# Altium PCB djb_v2_jig_b.PcbDoc
Units mm, origin at the board's own origin, x right, y up, seen from the top; angles counter-clockwise.
Board outline 29 x 28 mm, 2 copper layers (Top Layer, Bottom Layer); 14 components, 6 nets, 14 pads, 0 vias.
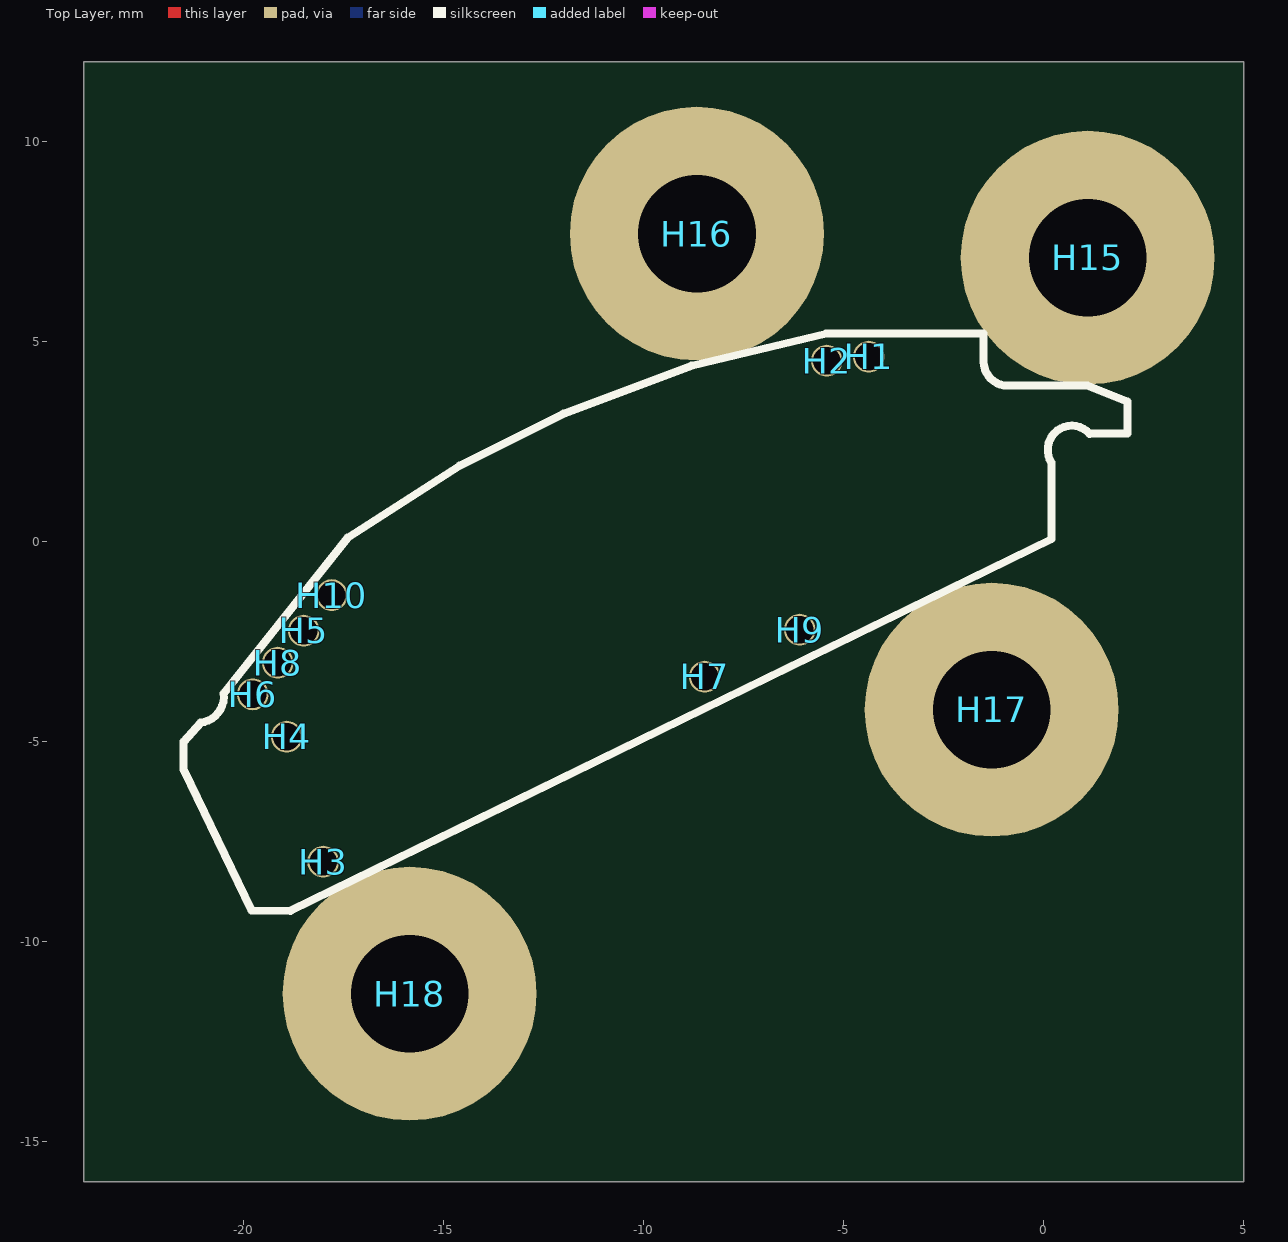
[diagram p0: Top Layer view]
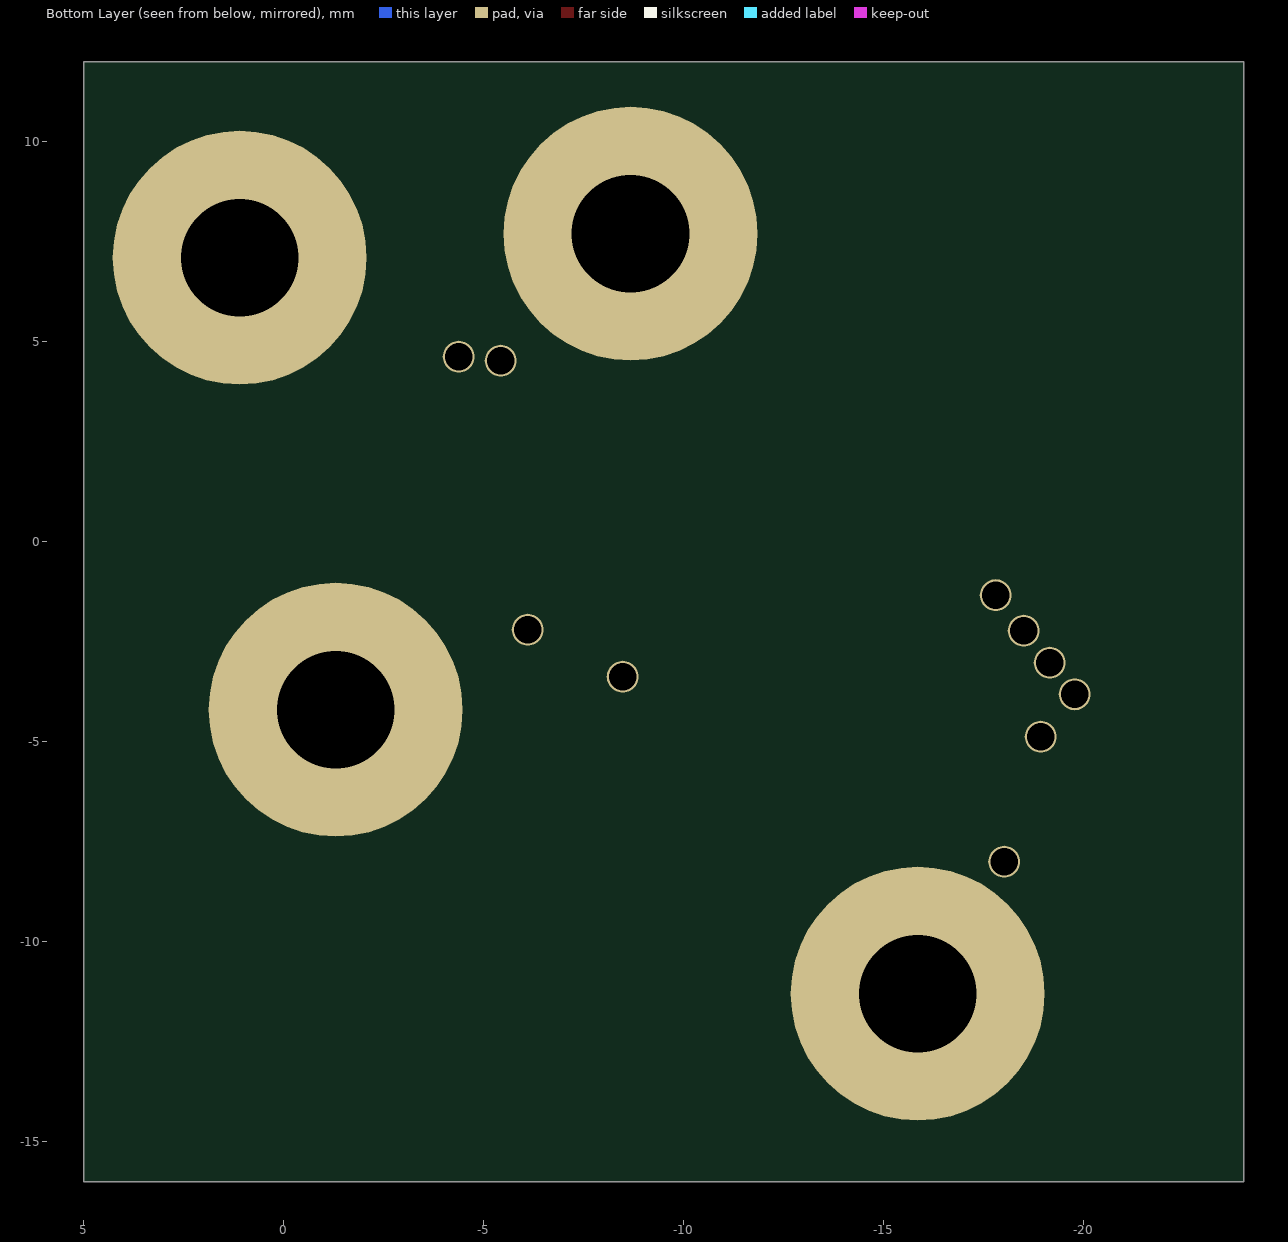
[diagram p1: Bottom Layer view, seen from below]

## Layer stack, top to bottom
Top Solder: solder mask 0.0102, Solder Resist, Dk 3.5
Top Layer: signal copper 0.0356
Dielectric 1: dielectric 0.32, FR-4, Dk 4.8
Bottom Layer: signal copper 0.0356
Bottom Solder: solder mask 0.0102, Solder Resist, Dk 3.5

## Board outline
-24,-16 5,-16 5,12 -24,12

## Design rules (kind name [scope] priority, off if disabled: settings)
Clearance [All] p1: gap=0.178 ignorepadtopadclearanceinfootprint=FALSE
ComponentClearance [All] p1: gap=0.025 collisioncheckmode=3 verticalgap=0.025 showdistances=TRUE
HoleSize [All] p1: absolutevalues=TRUE maxlimit=5.08 minlimit=0.254 maxpercent=80.000 minpercent=20.000
MinimumSolderMaskSliver [All] p1: minsoldermaskwidth=0.127
PolygonConnect [All] p1: connectstyle=Relief reliefconductorwidth=0.254 reliefentries=4 polygonreliefangle="90 Angle" airgapwidth=0.254
RoutingVias [All] p1: holewidth=0.51 width=0.8 viastyle="Through Hole" minholewidth=0.51 minwidth=0.8 maxholewidth=0.51 maxwidth=0.8
SilkToSilkClearance [All] p1: silktosilkclearance=0
SilkToSolderMaskClearance [IsPad] p1: minsilkscreentomaskgap=0 clearancetoexposedcopper=TRUE
SolderMaskExpansion [All] p1: expansion=0.102
Width [All] p1: maxlimit=1.27 minlimit=0.254 preferedwidth=0.254 minimp=50.000000 maximp=50.000000 favimp=50.000000
25 further rules are at their usual default settings.

## Components (designator, comment, footprint, x,y, rotation, side; value= is the part's Value field where it differs from the comment)
H1 "SMITHS_S-00-U-1.3-G_MID" SMITHS_S-00-U-1.3-G_MID -4.375,4.625 r0 top
H2 "SMITHS_S-00-U-1.3-G_MID" SMITHS_S-00-U-1.3-G_MID -5.425,4.525 r0 top
H3 "SMITHS_S-00-U-1.3-G_MID" SMITHS_S-00-U-1.3-G_MID -18.013,-8 r0 top
H4 "SMITHS_S-00-U-1.3-G_MID" SMITHS_S-00-U-1.3-G_MID -18.925,-4.875 r0 top
H5 "SMITHS_S-00-U-1.3-G_MID" SMITHS_S-00-U-1.3-G_MID -18.5,-2.225 r0 top
H6 "SMITHS_S-00-U-1.3-G_MID" SMITHS_S-00-U-1.3-G_MID -19.775,-3.816 r0 top
H7 "SMITHS_S-00-U-1.3-G_MID" SMITHS_S-00-U-1.3-G_MID -8.474,-3.375 r0 top
H8 "SMITHS_S-00-U-1.3-G_MID" SMITHS_S-00-U-1.3-G_MID -19.15,-3.025 r0 top
H9 "SMITHS_S-00-U-1.3-G_MID" SMITHS_S-00-U-1.3-G_MID -6.1,-2.2 r0 top
H10 "SMITHS_S-00-U-1.3-G_MID" SMITHS_S-00-U-1.3-G_MID -17.8,-1.336 r90 top
H15 "4-40" SCREW_4-40_BLANK 1.1,7.1 r0 top
H16 "4-40" SCREW_4-40_BLANK -8.671,7.7 r0 top
H17 "4-40" SCREW_4-40_BLANK -1.3,-4.2 r0 top
H18 "4-40" SCREW_4-40_BLANK -15.85,-11.3 r0 top

## Footprints (in the part's own frame and the unit in brackets; to place one, negate y for a bottom-side part, rotate by r counter-clockwise, add the part's x,y. Pads: shape width x height; smd on the part's side, far side on the other; paste and mask are expansions set on the pad)
SCREW_4-40_BLANK [mil] "Hole for 4-40 screw"
  round 250 hole 116 paste-39370.1 mask-39370.1: 0(0,0)
  body extent -4,96 4,104, height 0
SMITHS_S-00-U-1.3-G_MID [mm] "Smiths Interconnect / IDI S-00-U-1.3-G Pogo Pin, Mid Mount"
  round 0.8 hole 0.69: 1(0,0)
  body extent -0.02,0.36 0.02,0.39, height 0.01

## Part data
H1 H2 H3 H4 H5 H6 H7 H8 H9 H10: "Smiths Interconnect / IDI S-00-U-1.3-G Pogo Pin 0.99mm Centers 16.7mm Long 2.8mm Travel, Mid Mount"
H15 H16 H17 H18: library part SCREW_4-40_EMPTY

## Nets (pads, with @x,y where several pads share a name; then routed paths per layer and width w, separated by ;. In a path a pad name is that pad's centre, name@x,y a point inside that pad or via, vN(x,y) a via of type N, cw(c..) or ccw(c..) an arc to the next point about the centre after c; other vN are vias at no path point)
+3V7: 
GND: 
TCK: 
TDI: 
TDO: 
TMS: 
pads on no net: H1.1 H2.1 H3.1 H4.1 H5.1 H6.1 H7.1 H8.1 H9.1 H10.1 H15.0 H16.0 H17.0 H18.0

## Polygon pours and split planes (outlines as drawn)
no net on Bottom Layer "Bottom Layer-No Net" (solid, pour order 0): -23,13

## Silkscreen, mask and mechanical layers (free items; w line width, h text height)
Top Overlay:
  lines w0.2: 0.197,1.973 cw(c0.7,2.3) 1.148,2.699 ; 0.2,1.975 0.2,0.07 -18.836,-9.227 -19.8,-9.225 -21.5,-5.7 -21.5,-5 -21.075,-4.525 ccw(c-21.153,-3.875) -20.503,-3.797 -17.4,0.1 -14.6,1.9 -12,3.2 -8.8,4.4 -5.44,5.2 -1.5,5.2 -1.5,4.5 ; 1.148,2.7 2.1,2.7 2.1,3.5 1.1,3.9 -0.9,3.9 cw(c-0.9,4.5) -1.5,4.5 ; -1.5,4.5 -1.5,4.5
Top Solder:
  region: -5.1,4.9 -4.7,4.9 -4.7,4.3 -5.1,4.3
  region: -19.8,-3.5 -18.8,-2.2 -18.4,-2.5 -19.4,-3.8
Bottom Solder:
  region: -5.1,4.9 -4.7,4.9 -4.7,4.3 -5.1,4.3
  region: -19.8,-3.5 -18.8,-2.2 -18.4,-2.5 -19.4,-3.8
Mechanical 3:
  the board outline again, w0.2